# Altium PCB Main.PcbDoc
Units mil, origin at the board's own origin, x right, y up, seen from the top; angles counter-clockwise.
Board outline 3500 x 1250 mil, 3 copper layers (Top Layer, GND, Bottom Layer), stack 76.8 mil thick; 24 components, 19 nets, 102 pads, 28 vias.
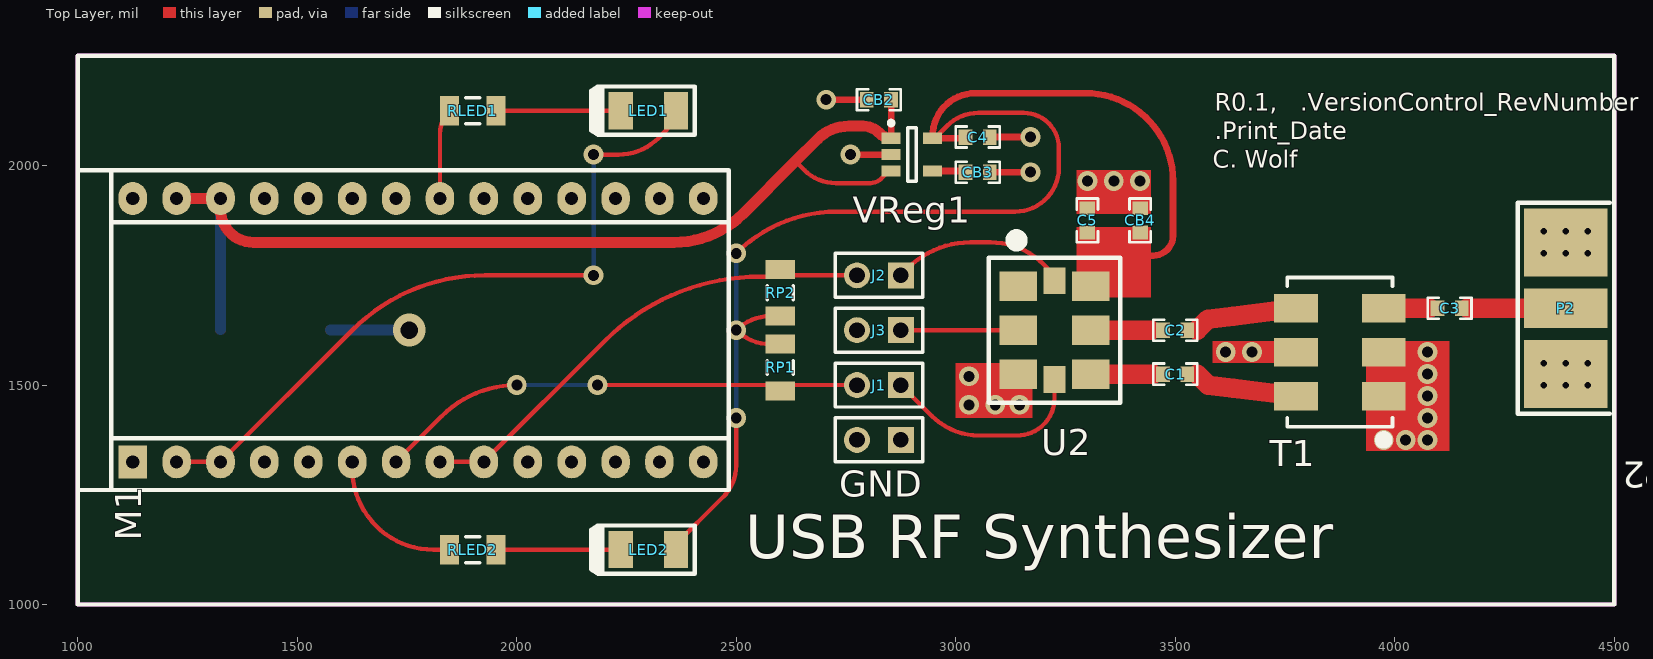
[diagram p0: Top Layer view]
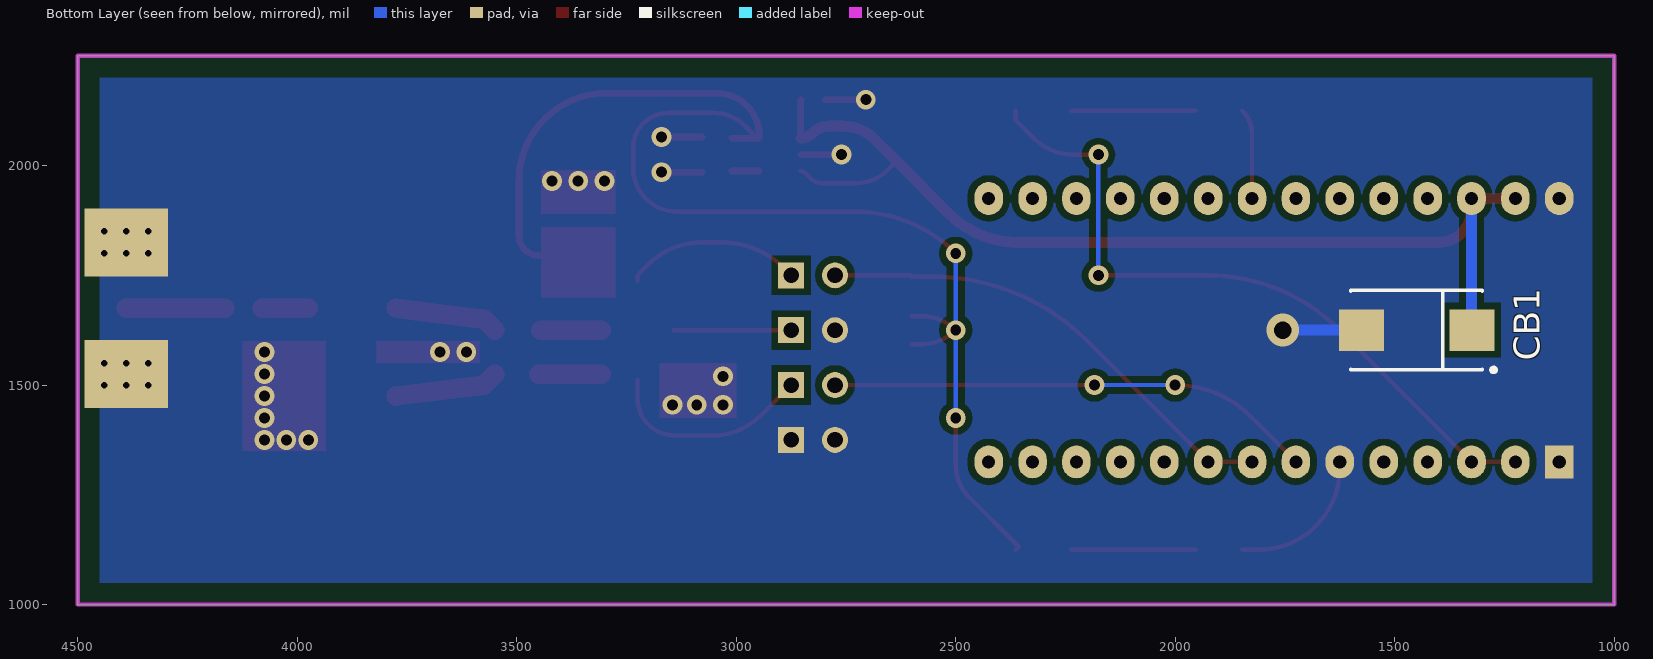
[diagram p1: Bottom Layer view, seen from below]
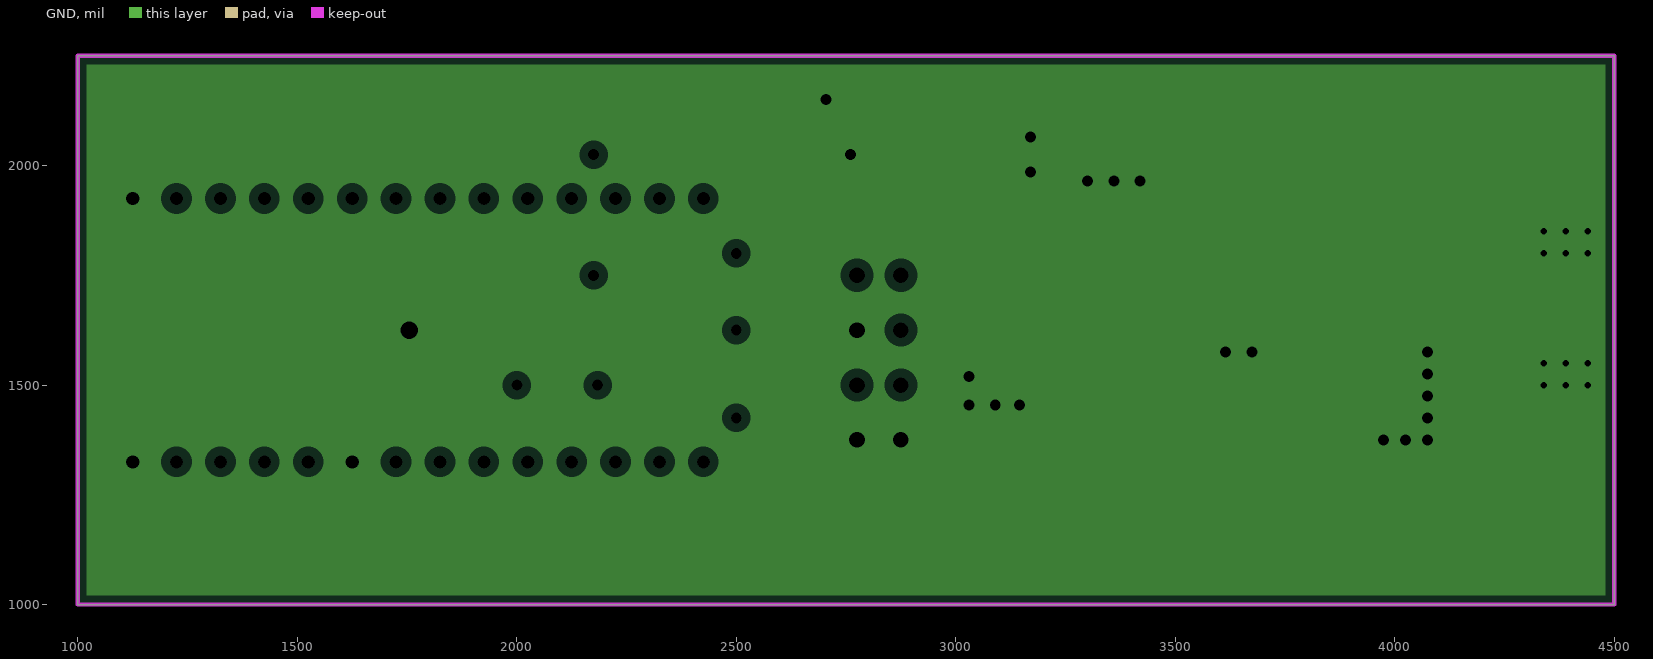
[diagram p2: GND, clearances drawn from the general rule]

## Layer stack, top to bottom
Top Layer: signal copper 1.4
Dielectric: core 60, FR-4, Dk 4.8
GND: plane copper 1.4, net GND
Dielectric: prepreg 12.6, FR-4, Dk 4.8
Bottom Layer: signal copper 1.4

## Board outline
1000,1000 1000,2250 4500,2250 4500,1000

## Design rules (kind name [scope] priority, off if disabled: settings)
Clearance "Clearance Poly" [InPolygon] p1: gap=15
Clearance [All] p2: gap=10
FlightTimeFalling [All] p1: maximum=1.000n
FlightTimeRising [All] p1: maximum=1.000n
HoleSize [All] p1: absolutevalues=TRUE maxlimit=500 minlimit=1 maxpercent=80.000 minpercent=20.000
HoleSize Testpoint [All] p2: absolutevalues=TRUE maxlimit=100 minlimit=1 maxpercent=80.000 minpercent=20.000
HoleSize TestPointUsage [All] p3: absolutevalues=TRUE maxlimit=100 minlimit=1 maxpercent=80.000 minpercent=20.000
MinimumAnnularRing [All] p1: minimumring=5
MinimumSolderMaskSliver [All] p1 off: minsoldermaskwidth=10
MinimumSolderMaskSliver SilkscreenOverComponentPads [All] p2 off: minsoldermaskwidth=10
OvershootFalling [All] p1: maximum=330.0m
OvershootRising [All] p1: maximum=330.0m
ParallelSegment [All] p1 off: limit=10000 gap=10
PlaneClearance [All] p1: clearance=20
PlaneConnect [All] p1: planeconnectstyle=Direct reliefexpansion=20 reliefentries=4 reliefconductorwidth=10 reliefairgap=10
PolygonConnect Heatsink [InNet('GND') vs InNet('GND')] p1: connectstyle=Direct reliefconductorwidth=10 reliefentries=4 polygonreliefangle="90 Angle" airgapwidth=10
PolygonConnect [All] p2: connectstyle=Relief reliefconductorwidth=10 reliefentries=4 polygonreliefangle="90 Angle" airgapwidth=10
RoomDefinition Main [InComponentClass('Main')] p1 off: confinementstyle=ConfineIn formatcopy=TRUE lockcomponents=FALSE outline 8590,1295 10590,1295 10590,2295 8590,2295
RoutingVias [All] p1: holewidth=15 width=30 viastyle="Through Hole" minholewidth=13 minwidth=25 maxholewidth=250 maxwidth=500
SignalStimulus [All] p1: kind=2 level=0 starttime=10.00n stoptime=60.00n periodtime=100.00n
SilkToSilkClearance [All] p1 off: silktosilkclearance=10
SilkToSolderMaskClearance [IsPad] p1 off: minsilkscreentomaskgap=10 clearancetoexposedcopper=TRUE
SolderMaskExpansion [All] p1: expansion=4
SupplyNets [All] p1: voltage=3.300
UndershootFalling [All] p1: maximum=330.0m
UndershootRising [All] p1: maximum=330.0m
Width "Schematic Width Constraint_5" [InNet('NetC1_1')] p1: maxlimit=102.58 minlimit=7.99 preferedwidth=86.97 toplayer_minwidth=44.65 bottomlayer_maxwidth=20.16 bottomlayer_prefwidth=16.88 impedancedriven=TRUE minimp=45.000000 maximp=70.000000 favimp=50.000000
Width "Schematic Width Constraint_4" [InNet('NetC2_1')] p2: maxlimit=102.58 minlimit=7.99 preferedwidth=86.97 toplayer_minwidth=44.65 bottomlayer_maxwidth=20.16 bottomlayer_prefwidth=16.88 impedancedriven=TRUE minimp=45.000000 maximp=70.000000 favimp=50.000000
Width "Schematic Width Constraint_3" [InNet('NetC1_2')] p3: maxlimit=102.58 minlimit=7.99 preferedwidth=86.97 toplayer_minwidth=44.65 bottomlayer_maxwidth=20.16 bottomlayer_prefwidth=16.88 impedancedriven=TRUE minimp=45.000000 maximp=70.000000 favimp=50.000000
Width "Schematic Width Constraint_2" [InNet('NetC2_2')] p4: maxlimit=102.58 minlimit=7.99 preferedwidth=86.97 toplayer_minwidth=44.65 bottomlayer_maxwidth=20.16 bottomlayer_prefwidth=16.88 impedancedriven=TRUE minimp=45.000000 maximp=70.000000 favimp=50.000000
Width "Schematic Width Constraint_1" [InNet('NetC3_1')] p5: maxlimit=102.58 minlimit=7.99 preferedwidth=86.97 toplayer_minwidth=44.65 bottomlayer_maxwidth=20.16 bottomlayer_prefwidth=16.88 impedancedriven=TRUE minimp=45.000000 maximp=70.000000 favimp=50.000000
Width "Schematic Width Constraint" [InNet('NetC3_2')] p6: maxlimit=102.58 minlimit=7.99 preferedwidth=86.97 toplayer_minwidth=44.65 bottomlayer_maxwidth=20.16 bottomlayer_prefwidth=16.88 impedancedriven=TRUE minimp=45.000000 maximp=70.000000 favimp=50.000000
Width Width_General [All] p7: maxlimit=250 minlimit=6 preferedwidth=10
Width "Width Differential Pair" [(InDifferentialPairClass('All Differential Pairs'))] p8: maxlimit=31.8 minlimit=1.94 preferedwidth=22.52 toplayer_minwidth=15.8 bottomlayer_maxwidth=5.3 bottomlayer_prefwidth=3.35 impedancedriven=TRUE minimp=80.000000 maximp=100.000000 favimp=90.000000
22 further rules are at their usual default settings.

## Components (designator, comment, footprint, x,y, rotation, side; value= is the part's Value field where it differs from the comment)
C1 "SMT Cap" 0603C 3500,1525 r0 top
C2 "SMT Cap" 0603C 3500,1625 r0 top
C3 "SMT Cap" 0603C 4125,1675 r0 top
C4 "SMT Cap" 0603C 3050,2065 r180 top
C5 "SMT Cap" 0603C 3300,1875 r270 top
CB1 "Cap Pol3" V 1450,1625 r0 bottom
CB2 "Cap Semi" 0603C 2825,2150 r0 top
CB3 "Cap Semi" 0603C 3050,1985 r180 top
CB4 "Cap Semi" 0603C 3420,1875 r270 top
GND "Jumper" HDR1X2 2875,1375 r180 top
J1 "Jumper" HDR1X2 2875,1500 r180 top
J2 "Jumper" HDR1X2 2875,1750 r180 top
J3 "Jumper" HDR1X2 2875,1625 r180 top
LED1 "LED2" "Chip LED 3220" 2300,2125 r180 top
LED2 "LED2" "Chip LED 3220" 2300,1125 r180 top
M1 "UM232H" "UM232H Module" 1125,1625 r90 top locked
P2 "COAX-M" "SMA Jack - PCB Edge - MultiSize" 4490,1675 r180 top
RLED1 "Res Semi" 1206R 1900,2125 r0 top
RLED2 "Res Semi" 1206R 1900,1125 r0 top
RP1 "Res Semi" 1206R 2600,1540 r90 top
RP2 "Res Semi" 1206R 2600,1710 r270 top
T1 "ADT4-1WT" CD542 3875,1575 r90 top
U2 "SI57x" SI57x 3225,1625 r270 top
VReg1 "MIC5205" SOT23-5AN 2900,2025 r0 top

## Footprints (in the part's own frame and the unit in brackets; to place one, negate y for a bottom-side part, rotate by r counter-clockwise, add the part's x,y. Pads: shape width x height; smd on the part's side, far side on the other; paste and mask are expansions set on the pad)
0603C [mm] "0603 Size Capacitor"
  rect 0.8x0.9 smd: 1(-0.7,0) 2(0.7,0)
  silkscreen extent -1.27,-0.61 1.27,0.61, body extent -0.87,-0.48 0.87,0.48, height 1.3
1206R [mm] "1206 Chip Resistor"
  rect 1.1x1.7 smd: 1(-1.35,0) 2(1.35,0)
  silkscreen extent -0.4,-0.75 0.4,0.75, body extent -1.7,-0.9 1.7,0.9, height 1.3
CD542 [mm] "Mini-Circuits CD542 Package"
  rect 1.65x2.54 smd paste-0.1: 1(-2.54,-2.54) 2(0,-2.54) 3(2.54,-2.54) 4(2.54,2.54) 5(0,2.54) 6(-2.54,2.54)
  silkscreen extent -5.33,-3.05 4.32,3.05, body extent -3.94,-2.79 3.94,2.79, height 3
"Chip LED 3220" [mm] "Chip LED 3220"
  rect 1.4x2.15 smd: 1(-1.6,0) 2(1.6,0)
  silkscreen extent -2.67,-1.4 3.3,1.4, body extent -1.9,-1 1.9,1, height 5.5
HDR1X2 [mm] "Connector; Header; 2 Position"
  rect 1.5x1.5 hole 0.9: 1(0,0)
  round 1.5 hole 0.9: 2(2.54,0)
  silkscreen extent -1.27,-1.27 3.81,1.27, body extent -1.27,-1.27 3.81,1.27, height 6.35
SI57x [mm] "Silicon Labs Programmable Oscillator"
  rect 1.7x2.15 smd: 1(-2.54,-2.1) 2(0,-2.1) 3(2.54,-2.1) 4(2.54,2.1) 5(0,2.1) 6(-2.54,2.1)
  rect 1.545x1.3 smd: 7(-2.852,0) 8(2.852,0)
  silkscreen extent -5.34,-3.8 4.2,3.8, body extent -4.2,-3.8 4.2,3.8, height 1.8
"SMA Jack - PCB Edge - MultiSize" [mil] "SMA Jack - PCB Edge - MultiSize"
  rect 190x90 smd: 1(100,0)
  round 30 hole 15: 2(50,175) 2(50,125) 2(50,-125) 2(50,-175) 2(100,175) 2(100,125) 2(100,-125) 2(100,-175) 2(150,125) 2(150,175) 2(150,-175) 2(150,-125)
  rect 190x155 smd: 2(100,150) 2(100,-150)
  rect 190x155 smd far side: 2(100,150) 2(100,-150)
  silkscreen extent 0,-240 210,240, body extent -5,-245 215,245, height 180
SOT23-5AN [mm] "SOT23, 5-Leads, Body 2.9x1.6mm, Pitch 0.95mm, Lead Span 2.8mm, IPC Medium Density"
  rect 1.1x0.65 smd: 1(-1.2,0.95) 2(-1.2,0) 3(-1.2,-0.95) 4(1.2,-0.95) 5(1.2,0.95)
  silkscreen extent -1.32,-1.55 0.25,1.95, body extent -1.48,-1.55 1.52,1.55, height 1.45
"UM232H Module" [mil]
  rect 75x65 hole 30: 1(-300,0)
  oval 75x65 hole 30: 2(-300,-100) 3(-300,-200) 4(-300,-300) 5(-300,-400) 6(-300,-500) 7(-300,-600) 8(-300,-700) 9(-300,-800) 10(-300,-900) 11(-300,-1000) 12(-300,-1100) 13(-300,-1200) 14(-300,-1300) 15(300,-1300) 16(300,-1200) 17(300,-1100) 18(300,-1000) 19(300,-900) 20(300,-800) 21(300,-700) 22(300,-600) 23(300,-500) 24(300,-400) 25(300,-300) 26(300,-200) 27(300,-100) 28(300,0)
  silkscreen extent -364,-1358 364,125, body extent -364,-1358 364,394, height 165
V [mm] "Capacitor, SM Tantalum; Body 7.3 x 4.3 mm (LxW typ)"
  rect 2.6x2.4 smd: 1(-3.2,0) 2(3.2,0)
  silkscreen extent -4.57,-2.3 3.8,2.42, body extent -3.78,-2.16 3.52,2.14, height 4.15

## Part data
C1 C2 C3 C4 C5: library part "Cap - SMT Small"
CB1: "KEMET T520 KO-CAP  Polymer SMT Tantalum"
CB2 CB3 CB4: "Capacitor (Semiconductor SIM Model)"
GND J1 J2 J3: library part "Jumper - 2 Pin", "Jumper - 2-Pin"
LED1 LED2: "Typical RED, GREEN, YELLOW, AMBER GaAs LED"
M1: "FTDI FT232H Dev Module"
P2: "RF Coaxial PCB Connector, MMCX; Thru-Hole, Vertical Mount Plug,  50 Ohm Impedance"
RLED1 RLED2 RP1 RP2: "Semiconductor Resistor"
T1: "Surface Mount RF Transformer"
U2: library part SI570, "10 MHZ TO 1.4 GHZ I2C PROGRAMMABLE XO/VCXO"
VReg1: "150mA Low-Noise LDO Regulator"

## Via types
v1: diameter 45, hole 25, Top Layer to Bottom Layer, tented both sides, 27 vias
v2: diameter 75, hole 40, Top Layer to Bottom Layer, tented both sides, 1 vias

## Nets (pads, with @x,y where several pads share a name; then routed paths per layer and width w, separated by ;. In a path a pad name is that pad's centre, name@x,y a point inside that pad or via, vN(x,y) a via of type N, cw(c..) or ccw(c..) an arc to the next point about the centre after c; other vN are vias at no path point)
3V3: C4.2 C5.2 CB4.2 LED2.1 RP1.2 RP2.2 U2.6 VReg1.5 | length 3175.9
  Top Layer w10: LED2.1 2356.5,1131.5 2470,1245 ccw(c2397.57,1317.43) 2500,1317.43 v1(2500,1425) ; v1(2500,1800) cw(c2729.35,1570.65) 2729.35,1895 3135,1895 ccw(c3135,1995) 3235,1995 3235,2040 ccw(c3155,2040) 3223.23,2081.77 ccw(c3155,2040) 3196.77,2108.23 ccw(c3155,2040) 3155,2120 3051.42,2120 ccw(c3051.42,2020) 2980.71,2090.71 2952.4,2062.4 VReg1.5 ; RP1.2 2576.89,1593.15 cw(c2576.89,1701.89) v1(2500,1625) cw(c2576.89,1548.11) 2576.89,1656.85 RP2.2
  Top Layer w15: VReg1.5 2947.24,2067.24 cw(c3045,2067.24) 3045,2165 3295,2165 cw(c3295,1965) 3495,1965 3495,1840 cw(c3450,1840) 3450,1795 3415,1795 ; VReg1.5@2952.4,2062.4 C4.2@3009.84,2062.4
  Bottom Layer w10: v1(2500,1425) v1(2500,1625) v1(2500,1800)
3V3FT: LED1.1 M1.2 M1.3 | length 1619.5
  Top Layer w10: M1.2 M1.3 1625,1625 cw(c1926.78,1323.22) 1926.78,1750 v1(2175,1750) ; v1(2175,2025) 2231.97,2025 ccw(c2231.97,2153.03) 2322.48,2062.48 2362.99,2102.99 LED1.1
  Bottom Layer w10: v1(2175,1750) v1(2175,2025)
5V0: CB1.1 CB2.2 M1.26 M1.27 VReg1.1 VReg1.3 | length 2429.4
  Top Layer w10: 2635,2010 2655.71,1989.29 ccw(c2726.42,2060) 2726.42,1960 2805.86,1960 ccw(c2805.86,1994.14) 2830,1970 2843.95,1983.95 cw(c2852.76,1975.15) VReg1.3
  Top Layer w15: CB2.2 2852.76,2149.8 VReg1.1
  Top Layer w25: M1.27 M1.26 1325,1900 ccw(c1400,1900) 1400,1825 2358.08,1825 ccw(c2358.08,2046.92) 2515,1890 2635,2010 2685.71,2060.71 cw(c2756.42,1990) 2756.42,2090 2788.79,2090 cw(c2788.79,2038.79) 2824.99,2075.01 2826.88,2073.12 ccw(c2852.76,2098.99) VReg1.1
  Bottom Layer w25: CB1.1@1325,1625.98 M1.26
GND: C4.1 C5.1 CB1.2 CB2.1 CB3.1 CB4.1 GND.1 GND.2 J3.2 M1.1 M1.6 M1.28 P2.2 RLED2.1 T1.1 T1.2 T1.5 U2.3 VReg1.2 | length 891.7
  Top Layer w10: M1.6 1625,1310 ccw(c1810,1310) 1810,1125 RLED2.1
  Top Layer w15: v1(2704.88,2150) CB2.1 ; v1(2760.2,2025) VReg1.2 ; CB3.1 v1(3170.12,1985) ; C4.1 v1(3170.12,2065)
  Bottom Layer w25: CB1.2 v2(1755,1625)
  other v1: 3975,1375 4025,1375 4075,1375 4075,1425 3030,1455 3090,1455 3145,1455 4075,1475 3030,1520 4075,1525 3615,1575 3675,1575 4075,1575 3300,1965 3360,1965 3420,1965
NetC1_1: C1.1 U2.4 | length 142.3
  Top Layer w44.65: U2.4 3450,1525
NetC1_2: C1.2 T1.6 | length 236.9
  Top Layer w44.65: 3550,1525 3575,1500 3632.14,1492.86 T1.6
NetC2_1: C2.1 U2.5 | length 137.3
  Top Layer w44.65: U2.5 3445,1625
NetC2_2: C2.2 T1.4 | length 236.9
  Top Layer w44.65: 3550,1625 3575,1650 3632.14,1657.14 T1.4
NetC3_1: C3.1 T1.3 | length 105
  Top Layer w44.65: T1.3 4080,1675
NetC3_2: C3.2 P2.1 | length 225
  Top Layer w44.65: C3.2@4165,1675 P2.1
NetCB3_2: CB3.2 VReg1.4 | length 62.6
  Top Layer w15: VReg1.4 CB3.2@3009.84,1987.6
NetJ1_1: J1.1 U2.8 | length 482.2
  Top Layer w10: J1.1 2945,1430 ; 2945.03,1429.97 ccw(c3053.64,1538.64) 3053.64,1385 3140,1385 ccw(c3140,1470) 3180,1395 ccw(c3140,1470) 3215,1430 ccw(c3140,1470) 3225,1470 U2.8
NetJ2_1: J2.1 U2.7 | length 408.9
  Top Layer w10: J2.1 2891.42,1766.42 cw(c3032.84,1625) 2891.46,1766.46 cw(c3032.84,1625) 3032.84,1825 3079.29,1825 cw(c3079.29,1654.29) 3200,1775 3225,1750 U2.7
NetJ3_1: J3.1 U2.2 | length 267.3
  Top Layer w10: J3.1 U2.2
NetLED1_2: LED1.2 RLED1.2 | length 283.9
  Top Layer w10: RLED1.2 LED1.2
NetLED2_2: LED2.2 RLED2.2 | length 283.9
  Top Layer w10: RLED2.2 LED2.2
NetM1_21: M1.21 RLED1.1 | length 205.8
  Top Layer w10: M1.21 1825,2072.25 cw(c1899.6,2072.25) RLED1.1
SCL: J1.2 M1.7 RP1.1 | length 1112.1
  Top Layer w10: M1.7 1829.29,1429.29 cw(c2000,1258.58) 1829.34,1429.34 cw(c2000,1258.58) v1(2000,1500) ; v1(2184.14,1500) J1.2
  Bottom Layer w10: v1(2000,1500) v1(2184.14,1500)
SDA: J2.2 M1.8 M1.9 RP2.1 | length 1103.2
  Top Layer w10: M1.8 M1.9 2200.4,1600.4 cw(c2553.96,1246.85) 2553.96,1746.85 RP2.1@2600,1746.85 ; RP2.1@2600,1750 J2.2
pads on no net: M1.4 M1.5 M1.10 M1.11 M1.12 M1.13 M1.14 M1.15 M1.16 M1.17 M1.18 M1.19 M1.20 M1.22 M1.23 M1.24 M1.25 U2.1

## Polygon pours and split planes (outlines as drawn)
GND on Bottom Layer "Gnd" (solid, pour order 2): 1050,1050 4450,1050 4450,2200 1050,2200 1050,1075 1050,1050
GND on GND (split plane): 4479.9,1020.1 1020.1,1020.1 1020.1,2229.9 4479.9,2229.9

## Keep-outs
Keep-Out Layer:
  the board outline again, w10

## Other copper
Top Layer:
  region net GND: 3445,1890 3445,1990 3275,1990 3275,1890
  rectangle net GND: 3000,1425 3175,1550
  region net 3V3: 3445,1860 3275,1860 3275,1700 3445,1700
  rectangle net GND: 3585,1550 3820,1600
  rectangle net GND: 3935,1350 4125,1600

## Silkscreen, mask and mechanical layers (free items; w line width, h text height)
Top Overlay:
  the board outline again, w10
  text "R0.1," at 3590,2125 h40
  text ".VersionControl_RevNumber" at 3785,2125 h40
  text ".Print_Date" at 3590,2060 h40
  text "C. Wolf" at 3585,1995 h40
  text "USB RF Synthesizer" at 2520,1105 h100

## Dimensions
1000,1260.83 to 1000,1000 on Mechanical 1
1000,1989.17 to 1000,2250 on Mechanical 1
1000,2250 to 1000,1000 on Mechanical 1

## Text inside footprints (layer, text, board x,y; h text height)
P2: Mechanical 1 "Board Edge" at 4560,1945 h60 r270